# EAGLE board SOIC20-TSSOP20 (EAGLE 7.3.0)
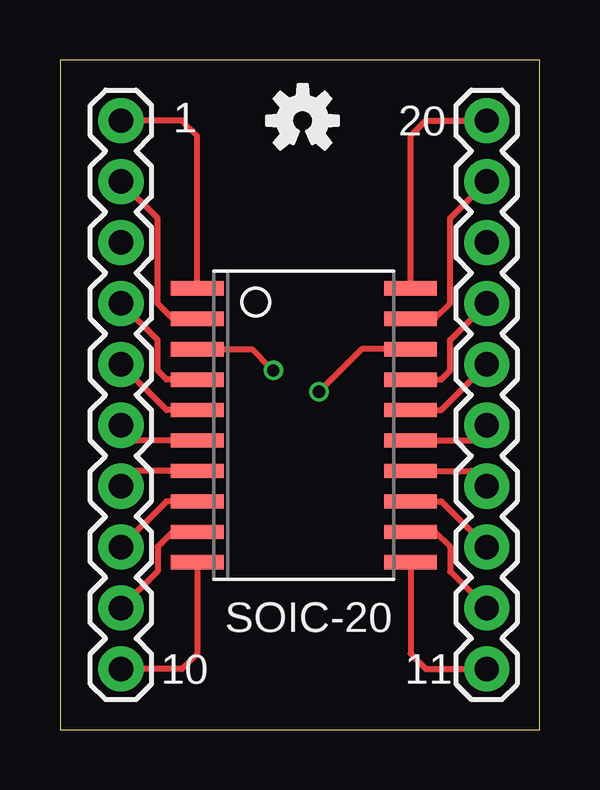
[diagram p0: board, top side]
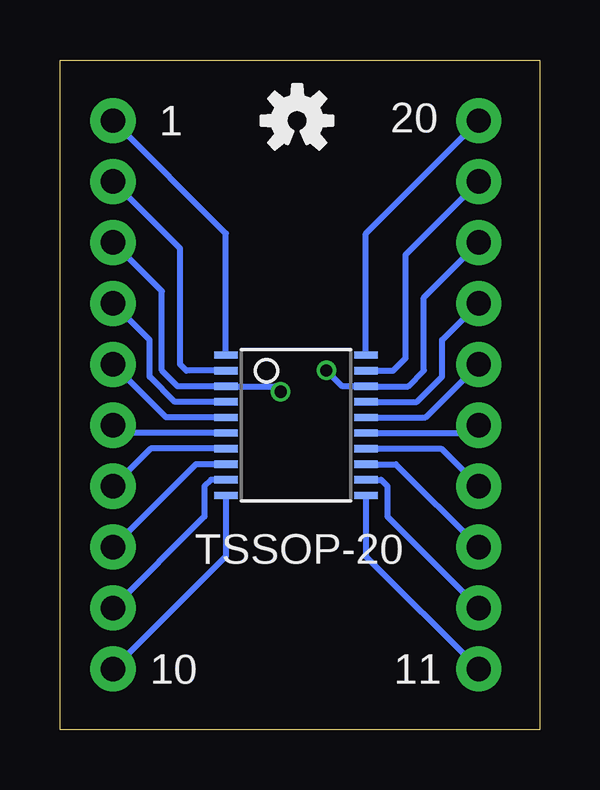
[diagram p1: board, bottom side, seen from below]

Size 19.99 x 27.93 mm. Coordinates in mm from the lower left corner, seen from the top.
Outline: 0,0 19.99,0 19.99,27.93 0,27.93 0,0
Copper layers (1*16): Top 0.035mm / dielectric 1.5mm / Bottom 0.035mm
Design rules "dirt_cheap_dirty_boards.v1": minimum track width 5mil, minimum drill 12mil, track to track 5mil, track to pad 5mil, pad to pad 5mil, via to via 5mil, smd to smd 0mil, copper to edge 10mil, drill to drill 10mil, minimum pad ring 10mil, minimum via ring 6mil, stop-mask expansion 2mil, vias tented up to drill 25mil, thermal gap 10mil

## Footprints (pad centres in the part's own frame; a part is rotated, then mirrored left to right if it is on the bottom)
1X10 = drill 1.016 pad 1.88: 1 0,0; 2 2.54,0; 3 5.08,0; 4 7.62,0; 5 10.16,0; 6 12.7,0; 7 15.24,0; 8 17.78,0; 9 20.32,0; 10 22.86,0
SOIC-20 = smd 0.6 x 2.2: 1 -5.715,-4.445; 2 -4.445,-4.445; 3 -3.175,-4.445; 4 -1.905,-4.445; 5 -0.635,-4.445; 6 0.635,-4.445; 7 1.905,-4.445; 8 3.175,-4.445; 9 4.445,-4.445; 10 5.715,-4.445; 11 5.715,4.445; 12 4.445,4.445; 13 3.175,4.445; 14 1.905,4.445; 15 0.635,4.445; 16 -0.635,4.445; 17 -1.905,4.445; 18 -3.175,4.445; 19 -4.445,4.445; 20 -5.715,4.445
TSSOP20 = smd 0.305 x 0.991: 1 -2.925,-2.918; 2 -2.275,-2.918; 3 -1.625,-2.918; 4 -0.975,-2.918; 5 -0.325,-2.918; 6 0.325,-2.918; 7 0.975,-2.918; 8 1.625,-2.918; 9 2.275,-2.918; 10 2.925,-2.918; 11 2.925,2.918; 12 2.275,2.918; 13 1.625,2.918; 14 0.975,2.918; 15 0.325,2.918; 16 -0.325,2.918; 17 -0.975,2.918; 18 -1.625,2.918; 19 -2.275,2.918; 20 -2.925,2.918

## Placement (x,y rotation side)
FRAME1  FRAME-LETTER  [CREATIVE_COMMONS]  -10.92,-9.09 0 top  (outside the outline)
JP1  M10"  [1X10]  2.54,2.54 90 top
JP2  M10"  [1X10]  17.78,2.54 90 top
U$1  SOIC-20  [SOIC-20]  10.16,12.7 270 top
U$2  TSSOP-20  [TSSOP20]  10.16,12.7 270 bottom
U$3  [OSHW-LOGO-S]  10.11,25.4 0 top
U$4  [OSHW-LOGO-S]  10.11,25.4 0 bottom

## Library data of the parts
FRAME1 U$3 U$4 = SparkFun-Aesthetics
JP1 JP2 = SparkFun-Connectors
U$1 U$2 = Kevin-GenericICFootprints

## Nets
N$1: JP1.10 U$1.1 U$2.20
N$2: JP1.9 U$1.2 U$2.19
N$3: JP1.8 U$1.3 U$2.18
N$4: JP1.7 U$1.4 U$2.17
N$5: JP1.6 U$1.5 U$2.16
N$6: JP1.5 U$1.6 U$2.15
N$7: JP1.4 U$1.7 U$2.14
N$8: JP1.3 U$1.8 U$2.13
N$9: JP1.2 U$1.9 U$2.12
N$10: JP1.1 U$1.10 U$2.11
N$11: JP2.10 U$1.20 U$2.1
N$12: JP2.9 U$1.19 U$2.2
N$13: JP2.8 U$1.18 U$2.3
N$14: JP2.7 U$1.17 U$2.4
N$15: JP2.6 U$1.16 U$2.5
N$16: JP2.5 U$1.15 U$2.6
N$17: JP2.4 U$1.14 U$2.7
N$18: JP2.3 U$1.13 U$2.8
N$19: JP2.2 U$1.12 U$2.9
N$20: JP2.1 U$1.11 U$2.10

## Tracks (layer width: path | path; a pad name or v marks a point on that pad's centre or on a via)
N$1
  Top 0.254: U$1.1 5.71,24.77 5.08,25.4 JP1.10
  Bottom 0.254: U$2.20 7.24,20.7 JP1.10
N$2
  Top 0.254: U$1.2 4.7,17.14 4.06,17.78 4.06,21.34 JP1.9
  Bottom 0.254: U$2.19 6.11,14.97 5.59,15.49 5.59,19.81 JP1.9
N$3  (via drill 0.51)
  Top 0.254: U$1.3 8,15.88 8.76,15.11 v8.89,14.99
  Bottom 0.254: JP1.8 4.83,18.03 4.83,14.99 5.49,14.32 U$2.18 8.23,14.32 v8.89,14.99
N$4
  Top 0.254: U$1.4 4.45,14.61 4.06,14.99 4.06,16.26 JP1.7
  Bottom 0.254: U$2.17 5.12,13.68 4.06,14.73 4.06,16.26 JP1.7
N$5
  Top 0.254: U$1.5 4.45,13.34 JP1.6
  Bottom 0.254: U$2.16 4.76,13.03 JP1.6
N$6
  Top 0.254: U$1.6 3.18,12.06 JP1.5
  Bottom 0.254: U$2.15 2.86,12.38 JP1.5
N$7
  Top 0.254: U$1.7 3.18,10.79 JP1.4
  Bottom 0.254: U$2.14 4.11,11.72 JP1.4
N$8
  Top 0.254: U$1.8 4.45,9.53 JP1.3
  Bottom 0.254: U$2.13 5.99,11.07 JP1.3
N$9
  Top 0.254: U$1.9 4.7,8.26 4.06,7.62 4.06,6.6 JP1.2
  Bottom 0.254: U$2.12 6.62,10.43 6.35,10.16 6.35,8.89 JP1.2
N$10
  Top 0.254: U$1.10 5.71,3.17 5.08,2.54 JP1.1
  Bottom 0.254: U$2.11 7.24,7.24 JP1.1
N$11
  Top 0.254: U$1.20 14.61,24.77 15.24,25.4 JP2.10
  Bottom 0.254: U$2.1 13.08,20.7 JP2.10
N$12
  Top 0.254: U$1.19 15.62,17.14 16.26,17.78 16.26,21.34 JP2.9
  Bottom 0.254: U$2.2 14.72,14.97 14.99,15.24 14.99,20.07 JP2.9
N$13  (via drill 0.51)
  Top 0.254: U$1.18 12.57,15.88 v10.79,14.1 10.67,13.97
  Bottom 0.254: JP2.8 15.75,18.29 15.75,14.99 15.09,14.32 U$2.3 11.02,14.32 v10.79,14.1
N$14
  Top 0.254: U$1.17 15.88,14.61 16.26,14.99 16.26,16.26 JP2.7
  Bottom 0.254: U$2.4 15.2,13.68 16.26,14.73 16.26,16.26 JP2.7
N$15
  Top 0.254: U$1.16 15.88,13.34 JP2.6
  Bottom 0.254: U$2.5 15.57,13.03 JP2.6
N$16
  Top 0.254: U$1.15 17.14,12.06 JP2.5
  Bottom 0.254: U$2.6 17.46,12.38 JP2.5
N$17
  Top 0.254: U$1.14 17.14,10.79 JP2.4
  Bottom 0.254: U$2.7 16.21,11.72 JP2.4
N$18
  Top 0.254: U$1.13 15.88,9.53 JP2.3
  Bottom 0.254: U$2.8 14.33,11.07 JP2.3
N$19
  Top 0.254: U$1.12 15.62,8.26 16.26,7.62 16.26,6.6 JP2.2
  Bottom 0.254: U$2.9 13.71,10.43 13.97,10.16 13.97,8.89 JP2.2
N$20
  Top 0.254: U$1.11 14.61,3.17 15.24,2.54 JP2.1
  Bottom 0.254: U$2.10 13.08,7.24 JP2.1

## Text on the board
tPlace: 1 | 20 | SOIC-20 | 10 | 11
bPlace: 20 | 1 | TSSOP-20 | 11 | 10
tDocu: Kevin Neubauer